# Altium PCB HV_DAC_1PPM.PcbDoc (part 4 of 5)
Units mm, origin at the board's own origin, x right, y up, seen from the top; angles counter-clockwise.
Board outline 148 x 86 mm, 6 copper layers (Layer 1, Layer 2, Layer 3, Layer 4, Layer 5, Layer 6), stack 1.615 mm thick; 392 components, 227 nets, 1037 pads, 645 vias.
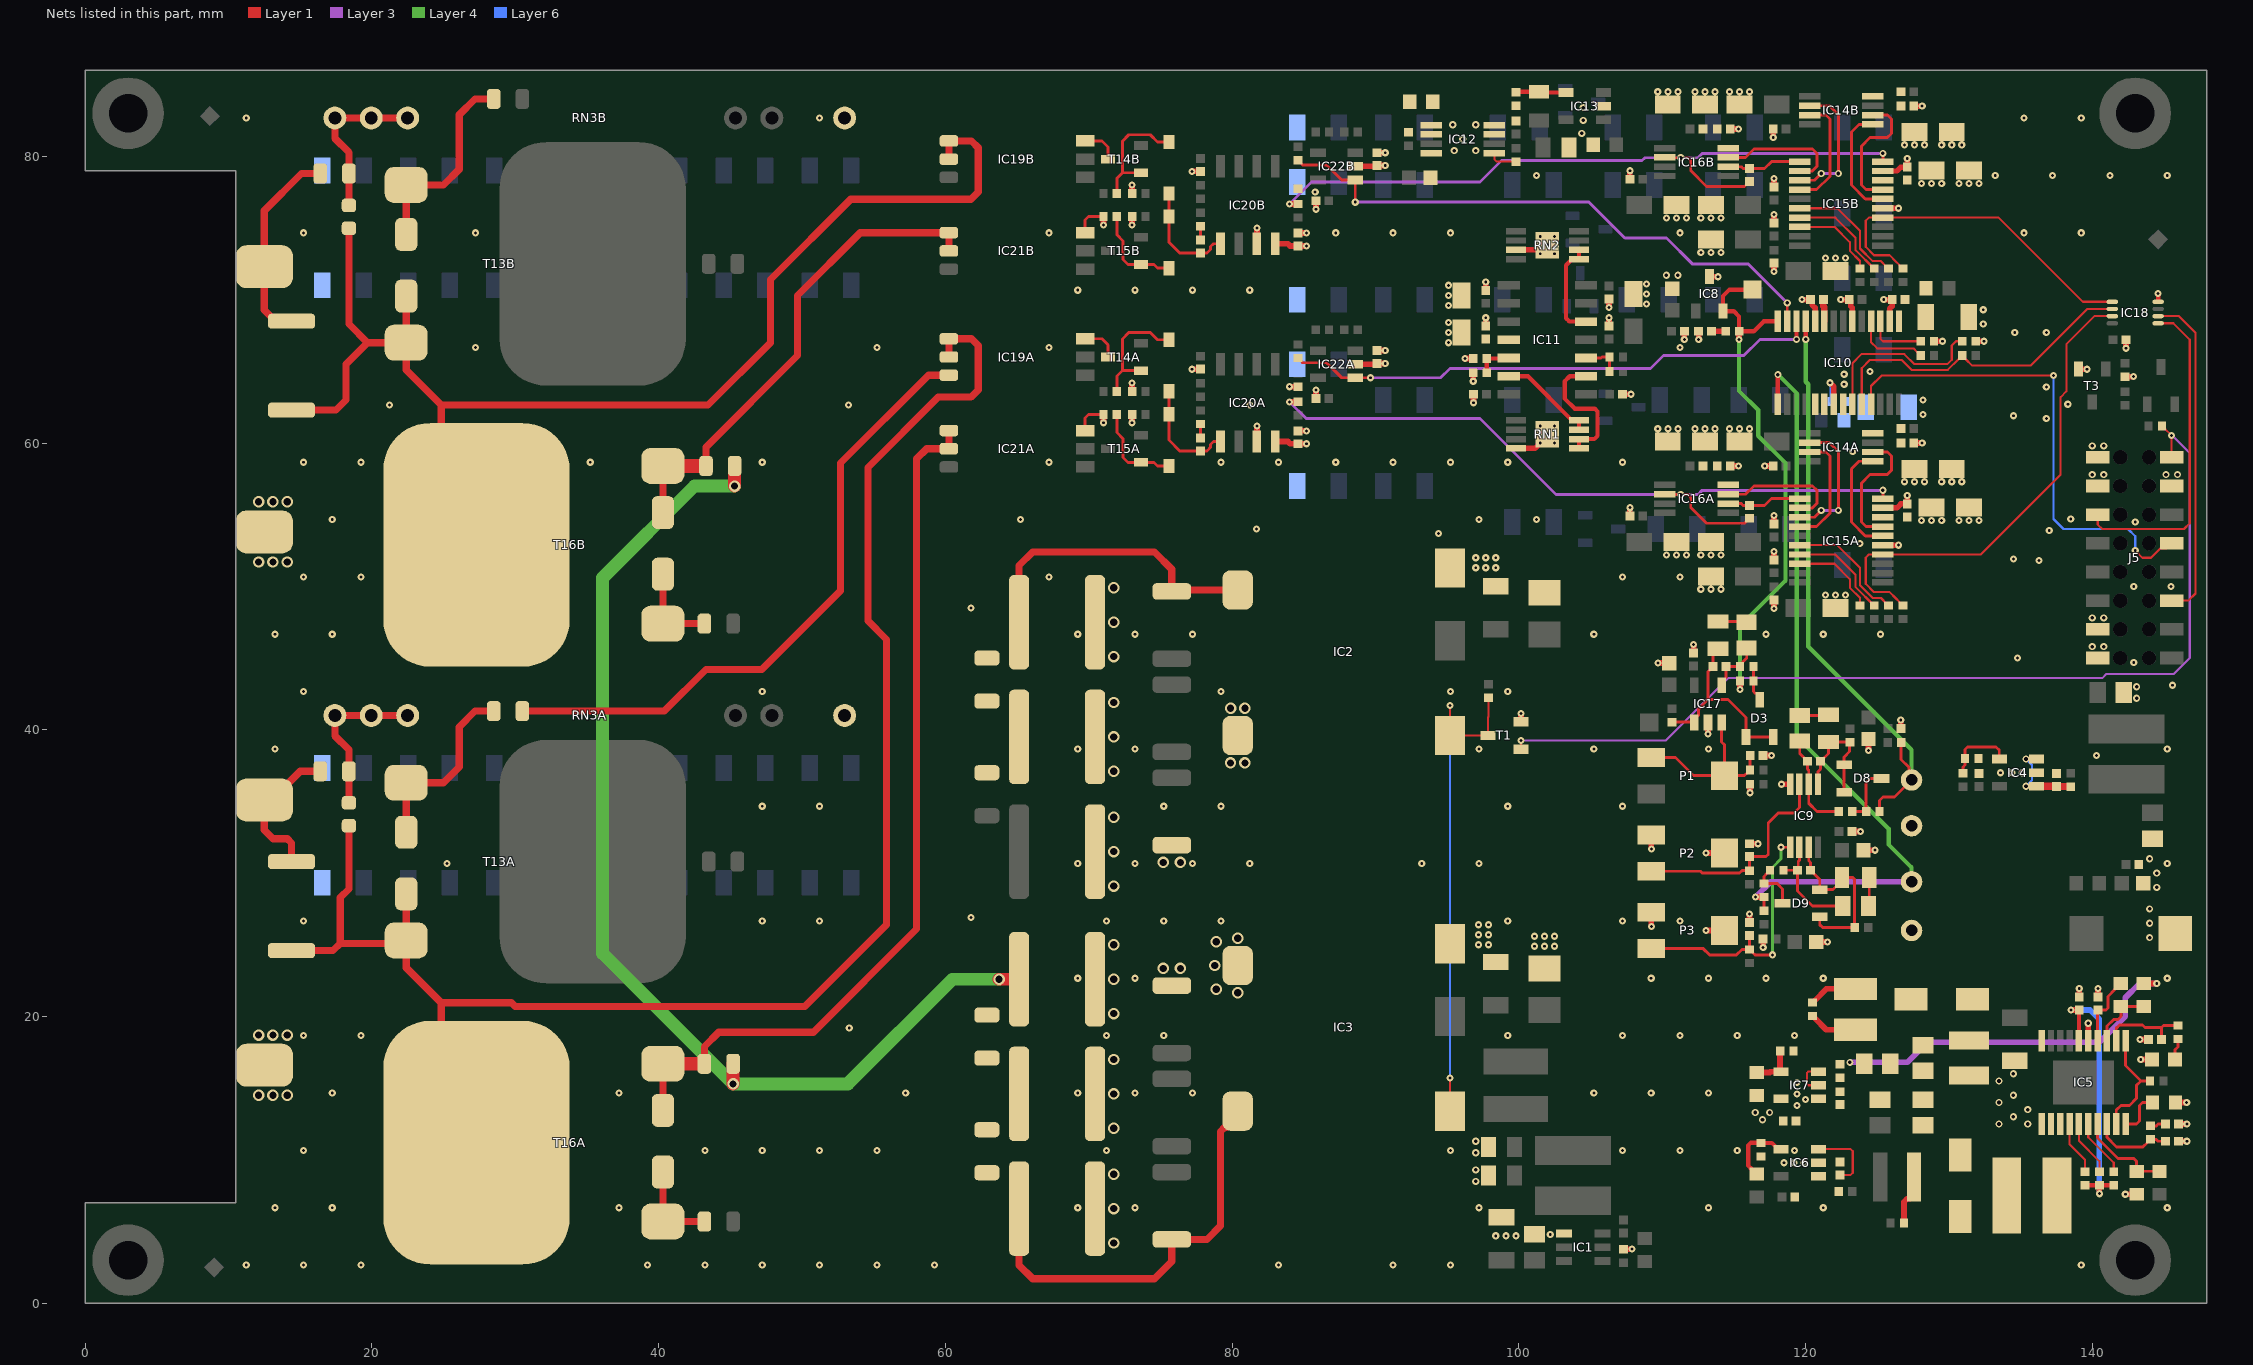
[diagram p6: the nets of this part, all layers, seen from the top]

## Part data (continued)
T13A T13B T16A T16B: "MOSFET N-CH 4500V 0.2A TO268", Case/Package=TO-268, Continuous Drain Current (ID)=200mA, Drain to Source Breakdown Voltage=4.5kV, Drain to Source Resistance=750R, Gate to Source Voltage (Vgs)=20V, Input Capacitance=256pF, Manufacturer=IXYS, Max Operating Temperature=150°C, Max Power Dissipation=113W, Min Operating Temperature=-55°C, Package Quantity=30, Supplier Part Number=747-IXTT02N450HV, Category=Transistors, ComponentLink1Description=https://datasheet.ciiva.com/6377/ds100498ixta-t02n450hv-6377632.pdf?src-supplier=Digikey, ComponentLink1URL=https://datasheet.ciiva.com/6377/ds100498ixta-t02n450hv-6377632.pdf?src-supplier=Digikey, Drain to Source Voltage (Vdss)=4.5kV, Fall Time=143ns, Manufacturer Part Number=IXTT02N450HV, Mounting Technology="Surface Mount", Packaging=Rail/Tube, Polarity=N-CHANNEL, Power Dissipation=113W, Pricing="1=30.1, 10=27.79, 50=20.94, 100=20.94, 1000=20.47, 10000=20.47 (USD)", Rds On Max=750R, Rise Time=48ns, RoHS=Yes, RoHS Compliant=Yes, Series=-, Stock=803, Supplier=Mouser, Turn-Off Delay Time=28ns
T14A T14B: "NPN Transistor", Case=SOT23-3, Manufacturer="NXP SEMICONDUCTORS", Author="CERN DEM JLC", Bonding=No, Component Type=Standard, ComponentHeight=1.1mm, CreateDate=6/14/2011, Device=BC847B, HelpURL=\\cern.ch\dfs\Applications\Altium\Datasheets\BC847B.pdf, LatestRevisionDate=6/14/2011, Manufacturer Part Number=BC847B, Mounted=Yes, PackageDescription="SOT23, 0.95mm Pitch; 3 Pin, 1.30mm W X 2.90mm L X 1.10mm H body, IPC Medium Density", Part Description="45V 100mA NPN General-Purpose Transistor", Part Number=BC847B, Pin Count=3, PressFit=No, Sense=No, SMD=Yes, Socket=No
T15A T15B: "PNP Transistor", Case=SOT23-3, Manufacturer="NXP SEMICONDUCTORS", Author="CERN DEM JLC", Bonding=No, Component Type=Standard, ComponentHeight=1.1mm, CreateDate=6/14/2011, Device=BC857B, HelpURL=\\cern.ch\dfs\Applications\Altium\Datasheets\BC857B.pdf, LatestRevisionDate=6/14/2011, Manufacturer Part Number=BC857B, Mounted=Yes, PackageDescription="SOT23, 0.95mm Pitch; 3 Pin, 1.30mm W X 2.90mm L X 1.10mm H body, IPC Medium Density", Part Description="-45V -100mA PNP General-Purpose Transistors", Part Number=BC857B, Pin Count=3, PressFit=No, Sense=No, SMD=Yes, Socket=No
TP2 TP3: library part SMD_PAD_1.27X1.27MM, Author="CERN DEM JLC", Component Type="Standard (No BOM)", ComponentHeight=0mm, CreateDate=12.01.2008, Family="Test Point", HelpURL=Undefined, LatestRevisionDate=12.01.2008, Mounted=No, PackageDescription="1.27mm x 1.27mm PCB Copper Area (SMD Test Point)", Part Description="1.27mm x 1.27mm PCB Copper Area (SMD Test Point)", Part Number=SMD_PAD_1.27X1.27MM, Pin Count=1, Sense=No, SMD=Yes, Socket=No, Status=None

## Via types
v1: diameter 0.5, hole 0.2, Layer 1 to Layer 6, tented both sides, 520 vias
v2: diameter 0.5, hole 0.25, Layer 1 to Layer 6, tented both sides, 74 vias
v3: diameter 0.8, hole 0.5, Layer 1 to Layer 6, tented both sides, 47 vias
v4: diameter 0.8, hole 0.5, Layer 1 to Layer 6, tented bottom, 2 vias
v5: diameter 0.5, hole 0.25, Layer 1 to Layer 6, tented bottom, 2 vias

## Nets (pads, with @x,y where several pads share a name; then routed paths per layer and width w, separated by ;. In a path a pad name is that pad's centre, name@x,y a point inside that pad or via, vN(x,y) a via of type N, cw(c..) or ccw(c..) an arc to the next point about the centre after c; other vN are vias at no path point)
ADC_AIN0: B5.1 IC10.11 R137.1 R139.1 | length 41.5
  Layer 1 w0.2: R139.1@125.17,34.3 125.17,35.07 125.4,35.3 126.2,35.3 B5.1@127.4,36.5 127.21,36.69 127.21,37.39 126.67,37.93 R137.1@126.67,39.1
  Layer 1 w0.3: v2(120.025,67.225) IC10.11@120.025,68.5
  Layer 4 w0.3: v2(120.025,67.225) 120.025,64.275 120.2,64.1 120.2,45.8 127.4,38.6 B5.1@127.4,36.5
ADC_AIN1: IC10.12 IC22A.1 R131A.1 | length 37.7
  Layer 1 w0.2: R131A.1@84.6,65.93 84.62,65.93 84.81,65.74 84.81,65.72 84.93,65.6 86.6,65.6 87.65,64.55 IC22A.1@88.6,64.55 v1(89.65,64.55)
  Layer 1 w0.3: v2(119.375,67.225) IC10.12@119.375,68.5
  Layer 3 w0.2: v1(89.65,64.55) 94.55,64.55 95.2,65.2 109.2,65.2 110.1,66.1 115.7,66.1 116.825,67.225 v2(119.375,67.225)
ADC_AIN4: IC10.13 IC22B.1 R131B.1 | length 40.4
  Layer 1 w0.2: R131B.1@84.6,79.73 84.62,79.73 84.81,79.54 84.81,79.52 84.93,79.4 86.6,79.4 87.65,78.35 IC22B.1@88.6,78.35 v1(88.6,76.8) ; IC10.13@118.725,68.5 v2(118.725,69.775)
  Layer 3 w0.2: v1(88.6,76.8) 104.9,76.8 107.4,74.3 110.3,74.3 112.1,72.5 116,72.5 v2(118.725,69.775)
ADC_AIN5: IC8.2 IC10.14 R61.1 R64.2 TP2.1 | length 36.8
  Layer 1 w0.3: TP2.1@116.3,70.7 114.7,70.7 114.25,70.25 IC8.2@114.25,69.2 115,69.2 115.37,68.83 R64.2@115.37,67.8 116.4,67.8 117.1,68.5 IC10.14@118.075,68.5
  Layer 1 w0.4: v1(115.37,67.21) R64.2@115.37,67.8 ; v1(115.43,42.81) R61.1@115.43,43.4
  Layer 4 w0.3: v1(115.37,67.21) 115.37,63.63 116.7,62.3 116.7,60.5 118.6,58.6 118.6,50.4 115.43,47.23 v1(115.43,42.81)
ADC_AIN6: B6.1 IC10.15 R138.1 R141.1 | length 54.2
  Layer 1 w0.2: R138.1@117.1,27.37 R141.1@117.1,28.33
  Layer 1 w0.3: IC10.15@118.075,62.7 v2(118.075,64.775)
  Layer 1 w0.4: v1(116.51,28.33) R141.1@117.1,28.33
  Layer 3 w0.4: v1(116.51,28.33) 117.58,29.4 B6.1@127.4,29.4
  Layer 4 w0.3: v2(118.075,64.775) 119.4,63.45 119.4,39.5 125.8,33.1 125.8,32 127.4,30.4 B6.1@127.4,29.4
ADC_AVDD: C47.2 C48.2 IC10.22 R98.1
  other v1: 122.7,64.1 122.7,64.8
ADC_CLK: IC10.3 R96.2 | length 4.1
  Layer 1 w0.15: IC10.3@125.225,68.5 125.225,67.275 125.4,67.1 R96.2@128.03,67.1
ADC_DRDYn: IC10.25 J5.9 | length 34.7
  Layer 1 w0.15: IC10.25@124.575,62.7 124.575,63.975 125.3,64.7 v1(137.3,64.7) ; v1(143,52.5) 143.5,52 144.1,52 144.734,52.634 145.169,52.634 J5.9@145.539,53.004
  Layer 6 w0.15: v1(137.3,64.7) 137.3,54.7 138,54 142.5,54 143,53.5 v1(143,52.5)
ADC_DVDD: C49.2 C50.2 IC10.1 R99.2
ADC_IEXC1: IC10.20
ADC_IEXC2: IC10.19
ADC_REFOUT: C46.2 IC10.9 | length 1.5
  Layer 1 w0.45: C46.2@121.25,70 121.25,69.55 121.325,69.475 IC10.9@121.325,68.5
ADC_RESETn: IC10.4 R95.1 | length 5.3
  Layer 1 w0.15: IC10.4@124.575,68.5 124.575,67.025 125,66.6 127.53,66.6 127.795,66.335 127.815,66.335 128.03,66.12 R95.1@128.03,66.1
ADC_START: IC10.23 R97.2 | length 12.3
  Layer 1 w0.15: IC10.23@123.275,62.7 123.275,65.575 123.9,66.2 126.9,66.2 127.6,65.5 129.9,65.5 130.2,65.8 130.2,66.8 130.5,67.1 R97.2@130.93,67.1
CSn_0: IC18.2 J5.5 | length 23.1
  Layer 1 w0.15: IC18.2@144.6,68.85 146.05,68.85 147.2,67.7 147.2,49.5 146.704,49.004 J5.5@145.539,49.004
CSn_1: IC18.1 J5.12 | length 22.9
  Layer 1 w0.15: J5.12@140.389,55.004 140.389,54.311 140.7,54 146.4,54 146.8,54.4 146.8,67.2 145.65,68.35 IC18.1@144.6,68.35
CSn_ADC: IC10.24 IC18.6 R94.1 | length 22.9
  Layer 1 w0.15: IC10.24@123.925,62.7 123.925,65.225 124.5,65.8 126.7,65.8 127.4,65.1 129.93,65.1 130.695,65.865 130.715,65.865 R94.1@130.93,66.08 ; R94.1@130.93,66.1 R94.1@130.93,66.08 ; IC18.6@141.4,69.35 139.65,69.35 135.7,65.4 131.63,65.4 131.165,65.865 131.145,65.865 R94.1@130.93,66.08
CSn_DAC1: IC15B.14 IC18.5 R108B.1 | length 24.8
  Layer 1 w0.15: R108B.1@126.8,72.17 126.78,72.17 126.565,72.385 126.565,72.405 126.285,72.685 125.87,73.1 124.782,73.1 124.2,73.682 124.2,75.5 124.425,75.725 IC15B.14@125.4,75.725 133.475,75.725 139.35,69.85 IC18.5@141.4,69.85
CSn_DAC2: IC15A.14 IC18.7 R108A.1 | length 34.3
  Layer 1 w0.15: R108A.1@126.8,48.67 126.78,48.67 126.565,48.885 126.565,48.905 126.285,49.185 125.87,49.6 124.782,49.6 124.2,50.182 124.2,52 124.425,52.225 IC15A.14@125.4,52.225 132.225,52.225 137.8,57.8 137.8,63.2 138.2,63.6 138.2,66.9 140.15,68.85 IC18.7@141.4,68.85
DAC_CLRnA: IC15A.7 R109A.1 | length 7.2
  Layer 1 w0.15: IC15A.7@119.6,52.225 122.075,52.225 123.5,50.8 123.5,49.95 124.78,48.67 R109A.1@124.8,48.67
DAC_CLRnB: IC15B.7 R109B.1 | length 7.2
  Layer 1 w0.15: IC15B.7@119.6,75.725 122.075,75.725 123.5,74.3 123.5,73.45 124.78,72.17 R109B.1@124.8,72.17
DAC_INVA: C71A.1 IC15A.1 IC16A.2 | length 5.2
  Layer 1 w0.2: IC16A.2@114.6,55.775 115.525,55.775 115.65,55.65 C71A.1@116.1,55.65 117.15,55.65 117.625,56.125 IC15A.1@119.6,56.125
DAC_INVB: C71B.1 IC15B.1 IC16B.2 | length 5.2
  Layer 1 w0.2: IC16B.2@114.6,79.275 115.525,79.275 115.65,79.15 C71B.1@116.1,79.15 117.15,79.15 117.625,79.625 IC15B.1@119.6,79.625
DAC_LDACnA: IC15A.8 R110A.1 | length 6.1
  Layer 1 w0.15: IC15A.8@119.6,51.575 122.025,51.575 123.1,50.5 123.1,49.9 123.8,49.2 R110A.1@123.8,48.67
DAC_LDACnB: IC15B.8 R110B.1 | length 6.1
  Layer 1 w0.15: IC15B.8@119.6,75.075 122.025,75.075 123.1,74 123.1,73.4 123.8,72.7 R110B.1@123.8,72.17
DAC_RESETnA: IC15A.6 R111A.1 | length 8.6
  Layer 1 w0.15: IC15A.6@119.6,52.875 122.225,52.875 123.8,51.3 123.8,50.074 124.689,49.185 125.265,49.185 125.68,48.77 R111A.1@125.8,48.77
DAC_RESETnB: IC15B.6 R111B.1 | length 8.6
  Layer 1 w0.15: IC15B.6@119.6,76.375 122.225,76.375 123.8,74.8 123.8,73.574 124.689,72.685 125.265,72.685 125.68,72.27 R111B.1@125.8,72.27
DAC_RFBA: C71A.2 IC15A.20 IC16A.6 R117A.2 | length 52.6
  Layer 1 w0.2: IC16A.6@110.225,56.4 v2(111.3,56.4) 111.8,56.4 112,56.2 112,55.5 113.1,54.4 115.75,54.4 C71A.2@116.1,54.75 ; IC15A.20@125.4,56.125 v2(125.4,56.7)
  Layer 1 w0.4: v1(84.01,62.87) R117A.2@84.6,62.87
  Layer 3 w0.2: v1(84.01,62.87) 85.18,61.7 97.3,61.7 102.6,56.4 v2(111.3,56.4) 112.5,56.4 112.8,56.7 v2(125.4,56.7)
DAC_RFBB: C71B.2 IC15B.20 IC16B.6 R117B.2 | length 51.3
  Layer 1 w0.2: IC16B.6@110.225,79.9 v2(111.3,79.9) 111.8,79.9 112,79.7 112,79 113.1,77.9 115.75,77.9 C71B.2@116.1,78.25 ; IC15B.20@125.4,79.625 v2(125.4,80.2)
  Layer 1 w0.4: v1(84.01,76.67) R117B.2@84.6,76.67
  Layer 3 w0.2: v1(84.01,76.67) 85.54,78.2 97.3,78.2 98.8,79.7 108.6,79.7 108.8,79.9 v2(111.3,79.9) 112.5,79.9 112.8,80.2 v2(125.4,80.2)
DAC_VOUTA: IC15A.2 IC16A.3 | length 8.8
  Layer 1 w0.2: IC16A.3@114.6,56.425 115.825,56.425 116.4,57 120.5,57 120.8,56.7 120.8,55.8 120.475,55.475 IC15A.2@119.6,55.475
DAC_VOUTB: IC15B.2 IC16B.3 | length 8.8
  Layer 1 w0.2: IC16B.3@114.6,79.925 115.825,79.925 116.4,80.5 120.5,80.5 120.8,80.2 120.8,79.3 120.475,78.975 IC15B.2@119.6,78.975
DAC_VREFNFA: IC14A.1 IC15A.16 | length 8
  Layer 1 w0.2: IC14A.1@124.7,58.725 123.725,58.725 123.2,58.2 123.2,54.5 124.175,53.525 IC15A.16@125.4,53.525
DAC_VREFNFB: IC14B.1 IC15B.16 | length 8
  Layer 1 w0.2: IC14B.1@124.7,82.225 123.725,82.225 123.2,81.7 123.2,78 124.175,77.025 IC15B.16@125.4,77.025
DAC_VREFNSA: IC14A.2 IC15A.17 | length 9.2
  Layer 1 w0.2: IC14A.2@124.7,59.375 125.725,59.375 126,59.1 126,58.1 125.7,57.8 124.5,57.8 123.9,57.2 123.9,54.5 124.225,54.175 IC15A.17@125.4,54.175
DAC_VREFNSB: IC14B.2 IC15B.17 | length 9.2
  Layer 1 w0.2: IC14B.2@124.7,82.875 125.725,82.875 126,82.6 126,81.6 125.7,81.3 124.5,81.3 123.9,80.7 123.9,78 124.225,77.675 IC15B.17@125.4,77.675
DAC_VREFPFA: IC14A.7 IC15A.4 | length 8
  Layer 1 w0.2: IC15A.4@119.6,54.175 120.775,54.175 121.7,55.1 121.7,59.1 121.425,59.375 IC14A.7@120.3,59.375
DAC_VREFPFB: IC14B.7 IC15B.4 | length 8
  Layer 1 w0.2: IC15B.4@119.6,77.675 120.775,77.675 121.7,78.6 121.7,82.6 121.425,82.875 IC14B.7@120.3,82.875
DAC_VREFPSA: IC14A.6 IC15A.3 | length 9.3
  Layer 1 w0.2: IC15A.3@119.6,54.825 120.625,54.825 v2(121.1,55.3) ; IC14A.6@120.3,60.025 121.675,60.025 122.3,59.4 v2(122.3,55.3)
  Layer 3 w0.2: v2(121.1,55.3) v2(122.3,55.3)
DAC_VREFPSB: IC14B.6 IC15B.3 | length 9.3
  Layer 1 w0.2: IC15B.3@119.6,78.325 120.625,78.325 v2(121.1,78.8) ; IC14B.6@120.3,83.525 121.675,83.525 122.3,82.9 v2(122.3,78.8)
  Layer 3 w0.2: v2(121.1,78.8) v2(122.3,78.8)
GND: B7.1 B8.1 C2.2 C3.1 C4.1 C5.1 C6.1 C7.1 C8.1 C9.1 C10.1 C11.1 C12.2 C13.2 C14.2 C15.2 C16.1 C17.1 C18.1 C19.1 C20.1 C21.1 C22.1 C23.1 C24.1 C25.1 C26.1 C27.2 C28.1 C29.1 C30.1 C31.1 C32.1 C33.1 C34.2 C35.1 C36.1 C37.1 C39.1 C41.1 C42.1 C43.1 C44.1 C45.1 C46.1 C47.1 C48.1 C49.1 C50.1 C51.2 C52.1 C53.1 C54.1 C55.1 C56.1 C57.1 C58.1 C59.1 C60.1 C61.1 C62.1 C63A.2 C63B.2 C64A.2 C64B.2 C65.1 C66A.1 C66B.1 C67A.1 C67B.1 C68.1 C72A.2 C72B.2 C73A.2 C73B.2 C74A.2 C74B.2 C75A.1 C75B.1 C76A.1 C76B.1 C77A.1 C77B.1 C78A.1 C78B.1 C79A.1 C79B.1 C80A.1 C80B.1 C81A.1 C81B.1 C82.1 C84A.1 C84B.1 C86A.1 C86B.1 C87A.1 C87B.1 C88A.2 C88B.2 C89A.2 C89B.2 C90A.1 C90B.1 C95.1 C96.1 C97.1 C98.1 C99.1 C101.1 C103.1 C104.1 IC1.1 IC2.1 IC2.4 IC3.1 IC3.3 IC4.2 IC5.1 IC5.15 IC6.2 IC7.1 IC8.3 IC9.4 IC10.2 IC10.6 IC10.10 IC10.21 IC12.3 IC12.4 IC12.5 IC12.8 IC13.2 IC15A.15 IC15A.19 IC15B.15 IC15B.19 IC17.2 IC18.4 IC20A.3 IC20B.3 J2.1 J4.1 J5.2 J5.4 J5.13 J5.14 J5.16 L7.1 P2.1 P2.2 P3.1 P3.2 R5.1 R11.1 R18.1 R21.2 R22.1 R23.2 R32.1 R84.1 R85.1 R86.1 R87.1 R88.1 R89.1 R90.1 R91.1 R92.1 R93.1 R96.1 R97.1 R102.1 R106.1 R107.1 R116A.1 R116B.1 R120A.2 R120B.2 R125.1 R130.2 R133A.2 R133B.2 RN1.8 RN1.9 RN2.3 RN2.9 RN3A.6 RN3B.6 T1.2 T3.2 | length 70
  Layer 1 w0.3: IC18.4@144.6,69.85 v1(144.6,70.44)
  Layer 1 w0.381: RN1.8@99.8,59.625 101.125,59.625 v1(101.5,60) ; RN2.3@99.8,73.475 101.366,73.475 101.5,73.341 v1(101.5,73.2) ; C46.1@120.35,70 120.47,69.881 120.47,69.63 120.675,69.425 IC10.10@120.675,68.5 ; v1(121.7,64.2) 121.975,63.925 IC10.21@121.975,62.7 ; C45.1@123.05,70 123.17,69.881 123.17,69.53 123.275,69.425 IC10.6@123.275,68.5 ; IC15A.19@125.4,55.475 126.375,55.475 126.65,55.75 C77A.1@127.1,55.75 ; IC15B.19@125.4,78.975 126.375,78.975 126.65,79.25 C77B.1@127.1,79.25 ; IC10.2@125.875,68.5 125.875,69.375 126.05,69.55 C49.1@126.05,70 ; IC5.15@139.725,18.3 v2(139.725,19.525)
  Layer 1 w0.4: v1(73.03,61.41) R120A.2@73.03,62 ; R116A.1@73.03,63.6 v1(73.03,64.19) ; v1(73.03,75.21) R120B.2@73.03,75.8 ; R116B.1@73.03,77.4 v1(73.03,77.99) ; v1(77.21,65.15) C80A.1@77.8,65.15 ; v1(77.21,78.95) C80B.1@77.8,78.95 ; IC20A.3@81.735,60.1 v1(81.735,61.19) ; IC20B.3@81.735,73.9 v1(81.735,74.99) ; v1(84.01,63.93) R133A.2@84.6,63.93 ; C90A.1@84.6,60.85 v1(85.19,60.85) ; C90B.1@84.6,74.65 v1(85.19,74.65) ; C86A.1@85.85,63.1 v1(85.85,63.69) ; v1(85.85,76.31) C86B.1@85.85,76.9 ; C84A.1@90.1,66.45 v1(90.69,66.45) ; C84B.1@90.1,80.25 v1(90.69,80.25) ; v1(96.24,65.9) R106.1@96.83,65.9 ; v1(96.83,64.31) R107.1@96.83,64.9 ; v1(96.85,62.81) C62.1@96.85,63.4 ; C61.1@97.7,68.15 v1(97.7,68.74) ; C65.1@97.7,70.65 v1(97.7,71.24) ; T1.2@100.15,40.55 v1(100.15,41.14) ; C52.1@106.3,68.15 v1(106.3,68.74) ; v1(106.3,69.46) C68.1@106.3,70.05 ; C55.1@107.25,63.4 v1(107.84,63.4) ; R5.1@107.3,3.77 v1(107.89,3.77) ; C66A.1@107.75,54.9 v1(107.75,55.49) ; C66B.1@107.75,78.4 v1(107.75,78.99) ; v1(109.25,26.28) P3.1@109.25,27.27 ; v1(109.25,31.68) P2.1@109.25,32.67 ; v1(109.71,44.65) C42.1@110.5,44.65 ; v1(111.55,67.21) C39.1@111.55,67.8 ; C43.1@112.2,45.35 v1(112.2,45.94) ; v1(112.55,67.21) C41.1@112.55,67.8 ; v1(113.06,26) P3.2@114.35,26 ; v1(113.06,31.4) P2.2@114.35,31.4 ; v1(113.2,39.71) IC17.2@113.2,40.5 ; IC8.3@113.3,71.6 v1(113.89,71.6) ; C88A.2@114.75,58.4 v1(115.34,58.4) ; C88B.2@114.75,81.9 v1(115.34,81.9) ; C104.1@116.1,26.55 v1(116.1,27.14) ; C103.1@116.1,32.05 v1(116.69,32.05) ; v1(116.13,35.61) R93.1@116.13,36.2 ; v1(117.05,24.81) C98.1@117.05,25.4 ; C44.1@117.05,38.2 v1(117.64,38.2) ; v1(117.16,58.4) C67A.1@117.75,58.4 ; v1(117.75,81.31) C67B.1@117.75,81.9 ; v1(117.8,48.46) C78A.1@117.8,49.05 ; C79A.1@117.8,51.85 v1(117.8,52.44) ; C75A.1@117.8,54.35 v1(117.8,54.94) ; v1(117.8,71.96) C78B.1@117.8,72.55 ; C79B.1@117.8,75.35 v1(117.8,75.94) ; C75B.1@117.8,77.85 v1(117.8,78.44) ; v1(118.335,36.2) IC9.4@118.925,36.2 ; v1(119.76,70) C46.1@120.35,70 ; C96.1@120.75,25.2 v1(121.54,25.2) ; v1(122.46,70) C45.1@123.05,70 ; C101.1@123.25,32.9 v1(123.84,32.9) ; C99.1@124.05,31.6 v1(124.84,31.6) ; v1(124.4,38.56) C95.1@124.4,39.35 ; IC15A.15@125.4,52.875 v1(126.49,52.875) ; IC15B.15@125.4,76.375 v1(126.49,76.375) ; v1(125.46,70) C49.1@126.05,70 ; C97.1@126.65,40.1 v1(126.65,40.69) ; C77A.1@127.1,55.75 v1(127.1,56.34) ; C77B.1@127.1,79.25 v1(127.1,79.84) ; C89A.2@127.55,60 v1(128.14,60) ; C89B.2@127.55,83.5 v1(128.14,83.5) ; R96.1@128.97,67.1 v1(129.56,67.1) ; R97.1@131.87,67.1 v1(132.46,67.1) ; T3.2@139.05,65.15 v1(139.64,65.15) ; C28.1@139.1,21.35 v1(139.1,21.94) ; C27.2@140.4,21.35 v1(140.4,21.94) ; R23.2@142.3,64.63 v1(142.89,64.63) ; v1(142.31,7.6) R22.1@143.1,7.6 ; v1(142.35,66.61) C82.1@142.35,67.2 ; v1(143.335,18.4) C24.1@143.925,18.4 ; v1(143.385,17) C26.1@144.175,17 ; R21.2@145.8,14 v1(146.59,14) ; C19.1@146.01,11.3 v1(146.6,11.3) ; C20.1@146.01,12.5 v1(146.6,12.5)
  Layer 6 w0.381: v1(121.7,64.2) 121.7,64.168 121.85,64.018 C48.1@121.85,62.9
  other v1: 11.237,2.662 15.237,2.662 19.237,2.662 39.237,2.662 43.237,2.662 47.237,2.662 51.237,2.662 55.237,2.662 59.237,2.662 83.237,2.662 91.237,2.662 95.237,2.662 139.237,2.662 98.4,4.7 99.1,4.7 99.8,4.7 102.2,4.8 13.237,6.662 17.237,6.662 37.237,6.662 69.237,6.662 73.237,6.662 97.237,6.662 113.237,6.662 121.237,6.662 145.237,6.662 118.5,9.8 119.2,9.8 119.9,9.8 15.237,10.662 43.237,10.662 47.237,10.662 51.237,10.662 55.237,10.662 71.237,10.662 95.237,10.662 107.237,10.662 111.237,10.662 115.237,10.662 119.237,10.662 119.4,13.8 120,14.2 119.4,14.6 17.237,14.662 37.237,14.662 57.237,14.662 69.237,14.662 73.237,14.662 77.237,14.662 105.237,14.662 109.237,14.662 113.237,14.662 119.4,15.4 15.237,18.662 19.237,18.662 71.237,18.662 75.237,18.662 99.237,18.662 107.237,18.662 111.237,18.662 115.237,18.662 119.237,18.662 53.3,19.2 69.237,22.662 73.237,22.662 109.237,22.662 113.237,22.662 117.237,22.662 121.237,22.662 145.237,22.662 101.1,24.9 101.8,24.9 102.5,24.9 97.2,25 97.9,25 101.1,25.6 101.8,25.6 102.5,25.6 97.2,25.7 97.9,25.7 97.2,26.4 97.9,26.4 15.237,26.662 47.237,26.662 51.237,26.662 71.237,26.662 75.237,26.662 79.237,26.662 99.237,26.662 107.237,26.662 111.237,26.662 61.8,26.9 25.237,30.662 69.237,30.662 73.237,30.662 77.237,30.662 81.237,30.662 93.237,30.662 97.237,30.662 145.237,30.662 47.237,34.662 51.237,34.662 75.237,34.662 79.237,34.662 99.237,34.662 107.237,34.662 133.6,37 134.4,37 135.1,37 140.3,38.2 13.237,38.662 69.237,38.662 73.237,38.662 97.237,38.662 105.237,38.662 113.237,38.662 145.237,38.662 15.237,42.662 47.237,42.662 79.237,42.662 95.237,42.662 99.237,42.662 145.6,43.1 142.9,44.7 134.8,45 13.237,46.662 17.237,46.662 69.237,46.662 73.237,46.662 77.237,46.662 105.237,46.662 117.237,46.662 121.237,46.662 125.237,46.662 61.8,48.5 121.4,49.4 122.1,49.4 122.8,49.4 112.7,49.8 113.4,49.8 114.1,49.8 142.9,50 145.5,50 15.237,50.662 19.237,50.662 67.237,50.662 107.237,50.662 111.237,50.662 97,51.3 97.7,51.3 98.4,51.3 136.3,51.8 134.5,51.9 97,52 97.7,52 98.4,52 110.3,52.2 111,52.2 111.7,52.2 112.7,52.2 113.4,52.2 114.1,52.2 123.8,53 94.4,53.7 137,53.9 81.7,54 143,54.5 130.7,54.6 131.4,54.6 132.1,54.6 17.237,54.662 65.237,54.662 97.237,54.662 101.237,54.662 138.5,54.7 129.5,57.3 130.2,57.3 130.9,57.3 15.237,58.662 19.237,58.662 35.237,58.662 47.237,58.662 67.237,58.662 79.237,58.662 83.237,58.662 87.237,58.662 91.237,58.662 95.237,58.662 99.237,58.662 107.237,58.662 123.3,59.4 102.5,60 102,60.6 109.7,61 110.4,61 111.1,61 114.7,61 115.4,61 116.1,61 101.5,61.2 102.5,61.2 136.8,61.7 134.5,61.9 128.2,62 21.237,62.662 53.237,62.662 81.237,62.662 138.3,62.7 128.2,63 136.8,63.9 124.5,65 27.237,66.662 55.237,66.662 67.237,66.662 111.237,66.662 134.6,67.7 136.8,67.7 132.4,68.3 132.4,69.3 95.1,69.6 108.9,69.7 95.1,70.3 108.9,70.4 69.237,70.662 73.237,70.662 77.237,70.662 81.237,70.662 95.1,71 108.9,71.1 121.4,72.9 122.1,72.9 122.8,72.9 102.5,73.2 112.7,73.3 113.4,73.3 114.1,73.3 102,73.8 101.5,74.4 102.5,74.4 15.237,74.662 27.237,74.662 67.237,74.662 87.237,74.662 91.237,74.662 95.237,74.662 111.237,74.662 135.237,74.662 139.237,74.662 110.3,75.7 111,75.7 111.7,75.7 112.7,75.7 113.4,75.7 114.1,75.7 85.8,77.5 130.7,78.1 131.4,78.1 132.1,78.1 101.237,78.662 133.237,78.662 137.237,78.662 141.237,78.662 145.237,78.662 129.5,80.8 130.2,80.8 130.9,80.8 11.237,82.662 51.237,82.662 135.237,82.662 139.237,82.662 109.7,84.5 110.4,84.5 111.1,84.5 114.7,84.5 115.4,84.5 116.1,84.5
  other v2: 97,8.5 97,9.3 97,10.5 97,11.3 133.5,12.5 135.5,12.5 134.5,13 135.5,13.5 133.5,14 134.5,14.5 133.5,15.5 134.5,16 144,25.5 144,26.5 144,27.5 144.5,29 144.5,30 144,31 143.1,42.2 143.1,43 140,45.8 140.8,45.8 140,47.8 140.8,47.8 140,57.8 140.8,57.8 145.15,57.8 145.95,57.8 140,59.8 140.8,59.8 110.3,71.7 111.1,71.7 95.5,80.4 97,80.4 96.1,81.2 104.4,81.6 95.4,82.2 97,82.2 104.5,82.5 104.5,83.4
  other v3: 71.75,4.2 71.75,6.6 71.75,9 71.75,12.2 12.1,14.5 13.1,14.5 14.1,14.5 71.75,14.6 71.75,17 12.1,18.7 13.1,18.7 14.1,18.7 71.75,20.2 80.398,21.655 78.9,21.9 71.75,22.6 75.2,23.35 76.4,23.35 78.798,23.555 71.75,25 78.9,25.21 80.398,25.455 71.75,29.1 75.2,30.75 76.4,30.75 71.75,31.5 71.75,33.9 71.75,37.1 79.895,37.69 80.895,37.69 71.75,39.5 79.9,41.5 80.9,41.5 71.75,41.9 71.75,45.1 71.75,47.5 71.75,49.9 12.1,51.7 13.1,51.7 14.1,51.7 12.1,55.9 13.1,55.9 14.1,55.9
HV_EN: J5.15 R8.1 T1.1 | length 68.2
  Layer 1 w0.15: T1.1@100.15,38.65 v1(100.15,39.24) ; R8.1@144.87,61.2 144.87,61.18 145.085,60.965 145.105,60.965 v1(145.539,60.531) J5.15@145.539,59.004
  Layer 3 w0.15: v1(100.15,39.24) 110.24,39.24 114.6,43.6 140.7,43.6 141,43.9 145.7,43.9 146.8,45 146.8,59.3 145.569,60.531 v1(145.539,60.531)
HV_OUT_RA: C85A.2 D4A.2 IC19A.4 IC19A.5 R118A.2 T13A.2 T16A.3 | length 118.6
  Layer 1 w0.5: R118A.2@14.4,24.6 17.3,24.6 17.8,25.1 ; C85A.2@18.4,33.275 18.4,28.9 17.8,28.3 17.8,25.1 ; D4A.2@22.4,28.55 T13A.2@22.4,25.3 ; T16A.3@27.3,11.2 24.843,13.657 24.843,20.957 ; IC19A.5@60.25,66 IC19A.4@60.25,67.27 61.83,67.27 62.3,66.8 62.3,63.7 61.8,63.2 59.5,63.2 54.6,58.3 54.6,47.6 55.9,46.3 55.9,26.4 50.2,20.7 30,20.7 29.743,20.957 24.843,20.957 ; 17.8,25.1 22.2,25.1 T13A.2@22.4,25.3 ; T13A.2@22.4,25.3 22.4,23.4 24.843,20.957
HV_OUT_RB: C85B.2 D4B.2 IC19B.4 IC19B.5 R118B.2 T13B.2 T16B.3 | length 92.1
  Layer 1 w0.5: R118B.2@14.4,62.3 17.5,62.3 18.2,63 18.2,65.5 19.7,67 ; C85B.2@18.4,74.975 18.4,68.3 19.7,67 ; D4B.2@22.4,70.25 22.4,69.25 T13B.2@22.4,67 ; T16B.3@27.3,52.9 24.843,55.357 24.843,62.657 ; IC19B.5@60.25,79.8 IC19B.4@60.25,81.07 61.83,81.07 62.3,80.6 62.3,77.5 61.8,77 53.4,77 47.8,71.4 47.8,67 43.457,62.657 24.843,62.657 ; 19.7,67 T13B.2@22.4,67 ; T13B.2@22.4,67 22.4,65.1 24.843,62.657
HV_OUTA: J3.1 R118A.1 R121A.2 | length 10.4
  Layer 1 w0.5: R118A.1@14.4,30.8 14.4,32.1 14.1,32.4 13.1,32.4 12.5,33 J3.1@12.5,35.1 13,35.1 15,37.1 R121A.2@16.4,37.1
HV_OUTB: J1.1 R118B.1 R121B.2 | length 14.1
  Layer 1 w0.5: R118B.1@14.4,68.5 13.275,68.5 12.5,69.275 12.5,76.2 15.1,78.8 R121B.2@16.4,78.8
N2kV0: C14.1 R7.2 R119A.2 R119B.2 | length 76.7
  Layer 1 w0.9: v3(45.2,15.3) R119A.2@45.2,16.7 ; v3(45.305,57) R119B.2@45.305,58.4 ; v4(63.75,22.6) C14.1@65.15,22.6
  Layer 4 w0.9: v3(45.305,57) 42.5,57 36.1,50.6 36.1,24.4 v3(45.2,15.3) 53.2,15.3 60.5,22.6 v4(63.75,22.6)
N14V0: C33.2 C60.2 C61.2 C69A.1 C69B.1 C70A.1 C70B.1 C76A.2 C76B.2 C77A.2 C77B.2 C81A.2 C81B.2 C84A.2 C84B.2 C87A.2 C87B.2 C88A.1 C88B.1 C89A.1 C89B.1 C90A.2 C90B.2 IC7.5 IC11.11 IC14A.4 IC14B.4 IC15A.18 IC15B.18 IC16A.4 IC16B.4 IC20A.4 IC20B.4 IC21A.3 IC21B.3 IC22A.2 IC22B.2 R30.2 R124A.1 R124B.1 | length 14.4
  Layer 1 w0.2: IC21A.3@69.75,60.87 69.75,61.75 70,62 R124A.1@71.03,62 ; IC21B.3@69.75,74.67 69.75,75.55 70,75.8 R124B.1@71.03,75.8
  Layer 1 w0.4: v1(71.03,61.41) R124A.1@71.03,62 ; v1(71.03,75.21) R124B.1@71.03,75.8 ; IC20A.4@83.005,60.1 83.9,60.1 84.05,59.95 C90A.2@84.6,59.95 v1(85.19,59.95) ; IC20B.4@83.005,73.9 83.9,73.9 84.05,73.75 C90B.2@84.6,73.75 v1(85.19,73.75) ; IC22A.2@88.6,65.5 90.05,65.5 C84A.2@90.1,65.55 v1(90.69,65.55) ; IC22B.2@88.6,79.3 90.05,79.3 C84B.2@90.1,79.35 v1(90.69,79.35)
  other v1: 128.1,54.6 128.8,54.6 129.5,54.6 126.9,57.3 127.6,57.3 128.3,57.3 112.3,61 113,61 113.7,61 95.1,67 95.1,67.7 95.1,68.4 128.1,78.1 128.8,78.1 129.5,78.1 126.9,80.8 127.6,80.8 128.3,80.8 112.3,84.5 113,84.5 113.7,84.5
  other v2: 116.5,13.3 117.5,13.3
  other v5: 117,12.8
N15V0: C32.2 L6.2 R28.2 R29.1 R31.2 | length 28.7
  Layer 1 w0.4: R31.2@120.5,20.03 120.52,20.03 120.62,19.931 120.62,19.911 121.455,19.075 L6.2@123.5,19.075 ; R28.2@143.6,22.3 v1(144.5,22.3)
  Layer 3 w0.4: v2(123.1,16.8) 127.1,16.8 128.5,18.2 140.5,18.2 142.3,20 142.3,21.3 143.3,22.3 v1(144.5,22.3)
NetC3_2: C3.2 IC2.3 R1.1 R127.2 | length 21.7
  Layer 1 w0.5: C3.2@65.15,47.5 65.15,51.45 66.1,52.4 74.6,52.4 75.8,51.2 R127.2@75.8,49.65 75.905,49.755 IC2.3@80.398,49.755
NetC4_2: C4.2 R1.2 R2.1
NetC12_1: C12.1 IC3.4 R6.1 R128.1 | length 29.4
  Layer 1 w0.5: C12.1@65.15,6.6 65.15,2.65 66.1,1.7 74.6,1.7 75.8,2.9 R128.1@75.8,4.45 78.25,4.45 79.2,5.4 79.2,11.982 79.493,12.275 79.593,12.275 80.398,13.08 IC3.4@80.398,13.395
NetC13_1: C13.1 R6.2 R7.1
NetC17_2: C17.2 IC4.1 IC4.3 R9.2 | length 6.1
  Layer 1 w0.15: v2(135.384,36.058) IC4.1@136.121,36.058 ; v2(135.384,37.958) IC4.3@136.121,37.958
  Layer 1 w0.5: IC4.1@136.121,36.058 137.492,36.058 C17.2@137.5,36.05 138.48,36.05 R9.2@138.5,36.03
  Layer 6 w0.15: v2(135.384,36.058) 135.8,36.474 135.8,37.542 v2(135.384,37.958)
NetC19_2: C19.2 IC5.8 R14.2 | length 5.6
  Layer 1 w0.2: IC5.8@141.025,12.5 141.025,11.575 141.7,10.9 143.53,10.9 143.85,11.22 143.85,11.24 144.04,11.43 R14.2@144.06,11.43 144.47,11.43 144.6,11.3 C19.2@145.11,11.3
NetC20_2: C20.2 R14.1 | length 1.1
  Layer 1 w0.2: R14.1@144.06,12.37 144.47,12.37 144.6,12.5 C20.2@145.11,12.5
NetC21_2: C21.2 D1.1 L5.1 R12.1 | length 3.6
  Layer 1 w0.4: R12.1@126.87,5.6 126.87,7.067 127.093,7.291 127.286,7.291 127.585,7.59 L5.1@127.585,8.8
NetC23_2: C23.2 IC6.1 IC6.3 R15.2 | length 4.9
  Layer 1 w0.15: IC6.3@120.9,10.75 123.15,10.75 123.3,10.6 123.3,9.1 123.15,8.95 C23.2@122.4,8.95
NetC24_2: C24.2 IC5.12 R19.2 | length 6.2
  Layer 1 w0.2: IC5.12@141.675,18.3 141.675,19.175 141.9,19.4 143.5,19.4 143.675,19.225 144.825,19.225 ; C24.2@144.825,18.4 144.825,19.225 ; R19.2@145.975,19.37 144.97,19.37 144.825,19.225
NetC26_2: C26.2 R19.1 | length 1.5
  Layer 1 w0.2: C26.2@145.775,17 145.775,17.675 145.975,17.875 R19.1@145.975,18.43
NetC27_1: C27.1 IC5.14 R27.2 | length 5
  Layer 1 w0.2: IC5.14@140.375,18.3 140.375,20.425 C27.1@140.4,20.45 140.95,20.45 141.1,20.6 141.1,21.4 141.6,21.9 141.6,21.95 141.95,22.3 R27.2@142,22.3
NetC28_2: C28.2 IC5.16 R24.2 R25.2 R26.2 | length 19.8
  Layer 1 w0.3: IC5.16@139.075,18.3 139.075,20.425 C28.2@139.1,20.45 ; R24.2@139.5,8.23 R26.2@141.5,8.23
  Layer 1 w0.4: v1(138.51,20.45) C28.2@139.1,20.45 ; v1(140.5,7.64) R25.2@140.5,8.23
  Layer 6 w0.4: v1(138.51,20.45) 139.85,20.45 140.5,19.8 v1(140.5,7.64)
NetC30_2: C30.2 IC7.2 IC7.3 R29.2 | length 2.4
  Layer 1 w0.15: IC7.2@120.9,15.2 120.2,15.2 120.1,15.3 120.1,16.062 120.188,16.15 IC7.3@120.9,16.15
NetC31_2: C31.2 D2.2 L6.1 R31.1 | length 3.4
  Layer 1 w0.4: R31.1@120.5,20.97 120.52,20.97 120.62,21.07 120.62,21.09 121.455,21.925 L6.1@123.5,21.925
NetC38_1: C38.1 C40.1 IC17.4 R62.2 | length 3.9
  Layer 1 w0.2: IC17.4@114.15,43.1 114.15,43.35 114.45,43.65 C40.1@114.45,44.4 R62.2@115.43,44.4 115.62,44.59 115.62,44.72 115.9,45 C38.1@115.9,45.7
NetC38_2: C38.2 R51.1 | length 2
  Layer 1 w0.2: R51.1@113.9,47.55 115.85,47.55 C38.2@115.9,47.5
NetC40_2: C40.2 D3.1 D3.2 IC17.1 R51.2 R63.1 | length 13.8
  Layer 1 w0.2: R63.1@110.7,40.53 IC17.1@112.22,40.53 ; IC17.1@112.25,40.5 112.25,40.75 112.55,41.05 112.55,41.45 113.2,42.1 ; R51.2@113.9,45.65 113.55,45.3 C40.2@113.55,44.4 113.2,44.05 113.2,42.1 ; D3.2@117.75,39.5 D3.1@115.85,39.5 115.85,40.85 114.6,42.1 113.2,42.1
NetC41_2: C41.2 R64.1 | length 1
  Layer 1 w0.4: C41.2@113.45,67.8 R64.1@114.43,67.8
NetC44_2: C44.2 IC17.3 P1.1 P1.2 R83.2 | length 12.4
  Layer 1 w0.2: P1.1@109.25,38.07 110.93,38.07 112.2,36.8 P1.2@114.35,36.8 ; IC17.3@114.15,40.5 114.15,39.15 114.35,38.95 P1.2@114.35,36.8 ; C44.2@116.15,38.2 116.13,38.18 R83.2@116.13,37.2 116.13,37.18 115.94,36.99 115.92,36.99 115.73,36.8 P1.2@114.35,36.8
NetC58_2: C58.2 IC12.6 R104.1
NetC83A_1: C83A.1 D5A.1 D6A.2 IC20A.1 | length 7.7
  Layer 1 w0.2: D5A.1@75.6,63.6 D6A.2@75.6,62 75.6,60.2 76.35,59.45 C83A.1@77.8,59.45 78.25,59.45 78.5,59.7 78.5,59.9 78.7,60.1 IC20A.1@79.195,60.1
NetC83A_2: C83A.2 R114A.1 | length 1
  Layer 1 w0.2: C83A.2@77.8,60.35 R114A.1@77.8,61.33
NetC83B_1: C83B.1 D5B.1 D6B.2 IC20B.1 | length 7.7
  Layer 1 w0.2: D5B.1@75.6,77.4 D6B.2@75.6,75.8 75.6,74 76.35,73.25 C83B.1@77.8,73.25 78.25,73.25 78.5,73.5 78.5,73.7 78.7,73.9 IC20B.1@79.195,73.9
NetC83B_2: C83B.2 R114B.1 | length 1
  Layer 1 w0.2: C83B.2@77.8,74.15 R114B.1@77.8,75.13
NetC85A_1: C85A.1 R121A.1 RN3A.1 RN3A.2 RN3A.3 | length 11.6
  Layer 1 w0.5: C85A.1@18.4,34.9 R121A.1@18.4,37.1 18.4,38.6 17.42,39.58 RN3A.1@17.42,41 RN3A.3@22.5,41
NetC85B_1: C85B.1 R121B.1 RN3B.1 RN3B.2 RN3B.3 | length 11.6
  Layer 1 w0.5: C85B.1@18.4,76.575 18.4,78.775 18.4,80.275 17.42,81.255 RN3B.1@17.42,82.675 RN3B.3@22.5,82.675
NetC91_1: C91.1 C93.1 IC9.2 R140.2 | length 6.9
  Layer 1 w0.2: C91.1@119.6,39.2 119.6,38.35 C93.1@120.15,37.8 120.15,37.25 120.225,37.175 IC9.2@120.225,36.2 120.225,34.875 120.8,34.3 R140.2@122.33,34.3
NetC91_2: C91.2 R135.1 | length 2
  Layer 1 w0.2: C91.2@119.6,41 121.55,41 R135.1@121.6,41.05
NetC92_1: C92.1 C94.1 IC9.6 R142.2 | length 7.7
  Layer 1 w0.2: R142.2@118.47,30.2 119.5,30.2 119.5,30.8 119.575,30.875 IC9.6@119.575,31.8 ; C94.1@119.45,30.2 119.45,28.75 120.5,27.7 C92.1@122.6,27.7
NetC92_2: C92.2 R136.1 | length 2
  Layer 1 w0.2: C92.2@124.4,27.7 124.45,27.75 R136.1@124.45,29.7
NetC93_2: C93.2 D8.1 D8.2 IC9.1 R135.2 R143.1 | length 8.4
  Layer 1 w0.2: IC9.1@120.875,36.2 120.875,37.075 121.05,37.25 C93.2@121.05,37.8 121.6,38.35 R135.2@121.6,39.15 123.08,39.15 123.08,38.48 122.7,38.1 D8.1@122.7,37.55 D8.2@122.7,35.65
NetC94_2: C94.2 D9.1 D9.2 IC9.7 R136.2 R144.1 | length 12.7
  Layer 1 w0.2: IC9.7@120.225,31.8 120.225,30.875 120.35,30.75 C94.2@120.35,30.2 121,29.55 D9.2@121,28.85 121.925,28.85 122.55,29.475 R136.2@122.55,29.7 123.3,29.7 123.43,29.57 R144.1@123.43,26.2 121.2,26.2 121,26.4 D9.1@121,26.95
NetC103_2: C103.2 IC9.3 P2.3 R145.1 | length 15.8
  Layer 1 w0.2: P2.3@109.25,30.13 112.67,30.13 112.8,30 115.4,30 115.57,30.17 R145.1@116.1,30.17 C103.2@116.1,31.15 117.25,31.15 117.4,31.3 117.4,33.5 118.1,34.2 119.2,34.2 119.575,34.575 IC9.3@119.575,36.2
NetC104_2: C104.2 IC9.5 P3.3 R146.1 | length 18.3
  Layer 1 w0.2: P3.3@109.25,24.73 112.87,24.73 113.3,24.3 115.2,24.3 115.57,24.67 R146.1@116.1,24.67 ; C104.2@116.1,25.65 R146.1@116.1,24.67 ; v1(117.7,24.3) 116.47,24.3 116.31,24.46 116.31,24.48 116.12,24.67 R146.1@116.1,24.67 ; v1(118.3,31.8) IC9.5@118.925,31.8
  Layer 4 w0.2: v1(117.7,24.3) 117.7,30.4 118.3,31 v1(118.3,31.8)
NetD1_2: D1.2 IC5.2 L4.2
NetD2_1: D2.1 IC5.20 L7.2
NetD3_3: D3.3 R61.2 R62.1 | length 2.5
  Layer 1 w0.2: R62.1@116.37,44.4 R61.2@116.37,43.4 116.37,42.667 116.487,42.55 116.6,42.55 116.8,42.35 D3.3@116.8,42.1
NetD4A_1: D4A.1 R113A.2 T13A.1 | length 13.3
  Layer 1 w0.5: D4A.1@22.4,32.85 T13A.1@22.4,36.3 25,36.3 26.1,37.4 26.1,40.2 27.2,41.3 R113A.2@28.5,41.3
NetD4B_1: D4B.1 R113B.2 T13B.1 | length 14.3
  Layer 1 w0.5: D4B.1@22.4,74.55 T13B.1@22.4,78 25,78 26.1,79.1 26.1,82.9 27.2,84 R113B.2@28.5,84
NetD5A_2: D5A.2 R115A.1 T14A.1 | length 8.8
  Layer 1 w0.2: R115A.1@71.97,63.6 71.97,64.67 72.35,65.05 ; T14A.1@73.65,65.05 72.35,65.05 ; D5A.2@75.6,67.2 74.8,67.2 74.3,67.7 72.8,67.7 72.35,67.25 72.35,65.05
NetD5B_2: D5B.2 R115B.1 T14B.1 | length 8.8
  Layer 1 w0.2: R115B.1@71.97,77.4 71.97,78.47 72.35,78.85 ; T14B.1@73.65,78.85 72.35,78.85 ; D5B.2@75.6,81 74.8,81 74.3,81.5 72.8,81.5 72.35,81.05 72.35,78.85
NetD6A_1: D6A.1 R124A.2 T15A.1 | length 6.6
  Layer 1 w0.2: R124A.2@71.97,62 71.97,60.73 72.4,60.3 72.4,59 72.75,58.65 T15A.1@73.65,58.65 74.55,58.65 74.8,58.4 D6A.1@75.6,58.4
NetD6B_1: D6B.1 R124B.2 T15B.1 | length 6.6
  Layer 1 w0.2: R124B.2@71.97,75.8 71.97,74.53 72.4,74.1 72.4,72.8 72.75,72.45 T15B.1@73.65,72.45 74.55,72.45 74.8,72.2 D6B.1@75.6,72.2
NetD7A_1: D7A.1 R122A.1 T16A.1 | length 6.3
  Layer 1 w0.5: D7A.1@40.3,9.15 T16A.1@40.3,5.7 R122A.1@43.2,5.7
NetD7A_2: D7A.2 IC21A.4 IC21A.5 R119A.1 T16A.2 | length 62.2
  Layer 1 w0.5: D7A.2@40.3,13.45 T16A.2@40.3,16.7 ; R119A.1@43.2,16.7 43.2,17.9 44.2,18.9 50.8,18.9 58,26.1 58,58.9 58.7,59.6 IC21A.5@60.25,59.6 IC21A.4@60.25,60.87
  Layer 1 w0.95: T16A.2@40.3,16.7 R119A.1@43.2,16.7
NetD7B_1: D7B.1 R122B.1 T16B.1 | length 6.3
  Layer 1 w0.5: D7B.1@40.3,50.85 T16B.1@40.3,47.4 R122B.1@43.2,47.4
NetD7B_2: D7B.2 IC21B.4 IC21B.5 R119B.1 T16B.2 | length 34.4
  Layer 1 w0.5: D7B.2@40.3,55.15 T16B.2@40.3,58.4 T16B.2@40.405,58.4 ; R119B.1@43.305,58.4 43.305,59.705 49.7,66.1 49.7,70.3 54.07,74.67 IC21B.4@60.25,74.67 IC21B.5@60.25,73.4
  Layer 1 w0.95: T16B.2@40.405,58.4 R119B.1@43.305,58.4
NetD8_3: D8.3 R139.2 R140.1 | length 4.2
  Layer 1 w0.2: R140.1@123.27,34.3 R139.2@124.23,34.3 124.23,36.33 124.5,36.6 D8.3@125.3,36.6
NetD9_3: D9.3 R141.2 R142.1 | length 3.6
  Layer 1 w0.2: R142.1@117.53,30.2 117.53,30.18 117.34,29.99 117.32,29.99 117.1,29.77 R141.2@117.1,29.27 118.03,29.27 118.4,28.9 D9.3@118.4,27.9
NetIC2_5: IC2.5 IC3.5 R4.2 T1.3 | length 35.7
  Layer 1 w0.15: v1(95.2,15.7) 95.203,15.697 IC3.5@95.203,13.395 ; v1(95.2,41.7) 95.2,39.598 IC2.5@95.203,39.595 ; IC2.5@95.208,39.6 T1.3@97.85,39.6 97.85,40.85 97.9,40.9 R4.2@97.9,42.23
  Layer 6 w0.15: v1(95.2,15.7) v1(95.2,41.7)
NetIC4_4: IC4.4 R10.1 R11.2 | length 4.9
  Layer 1 w0.2: R10.1@131,36.97 131,37.4 131.13,37.53 R11.2@131.13,38 131.13,38.63 131.3,38.8 133.3,38.8 133.521,38.579 IC4.4@133.521,37.958
NetIC5_3: IC5.3 L4.1
NetIC5_4: IC5.4 R24.1 | length 3.8
  Layer 1 w0.15: IC5.4@138.425,12.5 138.425,11.075 139.5,10 R24.1@139.5,9.17
NetIC5_5: IC5.5 R25.1 | length 3.9
  Layer 1 w0.15: IC5.5@139.075,12.5 139.075,11.325 140.5,9.9 R25.1@140.5,9.17
NetIC5_6: IC5.6 R26.1 | length 4.1
  Layer 1 w0.15: IC5.6@139.725,12.5 139.725,11.575 141.5,9.8 R26.1@141.5,9.17
NetIC5_7: IC5.7 R20.1 R22.2 | length 6.7
  Layer 1 w0.2: IC5.7@140.375,12.5 140.375,11.525 141.8,10.1 142.9,10.1 143.1,9.9 R22.2@143.1,9.2 R20.1@144.7,9.2
NetIC5_9: IC5.9 IC5.11 R13.1 | length 7.9
  Layer 1 w0.2: IC5.9@141.675,12.5 141.675,13.475 142,13.8 142.6,13.8 143.1,14.3 143.1,15.2 143.4,15.5 ; IC5.11@142.325,18.3 142.325,16.575 143.4,15.5 ; R13.1@144.03,15.5 143.4,15.5
NetIC5_10: IC5.10 R21.1 | length 3.1
  Layer 1 w0.2: IC5.10@142.325,12.5 143.1,12.5 143.3,12.7 143.3,13.8 143.5,14 R21.1@144.2,14
NetIC5_13: IC5.13 R27.1 R28.1 | length 4.6
  Layer 1 w0.2: IC5.13@141.025,18.3 141.025,19.325 141.5,19.8 141.8,19.8 142,20 R27.1@142,20.7 R28.1@143.6,20.7
NetIC6_4: IC6.4 R16.1 R18.2 | length 4.8
  Layer 1 w0.3: R16.1@116.6,9 116.55,9 116.25,9.3 116.25,9.35 116,9.6 116,11 116.2,11.2 116.87,11.2 R18.2@116.9,11.17 117.655,11.17 118.075,10.75 IC6.4@118.3,10.75
NetIC7_4: IC7.4 R30.1 R32.2 | length 3.2
  Layer 1 w0.4: R30.1@116.6,16.1 117.5,16.1 117.55,16.15 IC7.4@118.3,16.15 118.23,16.22 R32.2@118.23,17.6
NetIC11_2: IC11.2 RN1.1 RN1.2 | length 9.3
  Layer 1 w0.3: RN1.1@104.2,59.625 RN1.2@104.2,60.275 105.275,60.275 105.5,60.5 105.5,62.2 105.3,62.4 103.9,62.4 103.2,63.1 103.2,64.3 103.56,64.66 IC11.2@104.7,64.66
NetIC11_3: IC11.3 R101.2 R103.2 | length 2.7
  Layer 1 w0.2: IC11.3@104.7,65.93 105.73,65.93 105.8,66 R101.2@106.33,66 R103.2@106.33,65
NetIC11_5: IC11.5 RN2.5 RN2.6 | length 6.9
  Layer 1 w0.3: RN2.6@104.2,73.475 RN2.5@104.2,72.825 103.725,72.825 103.3,72.4 103.3,68.7 103.53,68.47 IC11.5@104.7,68.47
NetIC11_12: IC11.12 R106.2 R107.2 | length 2.5
  Layer 1 w0.3: R107.2@97.77,64.9 R106.2@97.77,65.9 99.27,65.9 IC11.12@99.3,65.93
NetIC11_13: IC11.13 RN1.3 RN1.4 | length 6.8
  Layer 1 w0.3: IC11.13@99.3,64.66 100.64,64.66 103.65,61.65 104.125,61.65 RN1.4@104.2,61.575 RN1.3@104.2,60.925
NetIC12_1: IC12.1 R105.2 | length 2
  Layer 1 w0.15: IC12.1@98.3,80.225 98.3,79.8 98.47,79.63 R105.2@99.8,79.63
NetIC13_4: IC13.4 R100.1 R102.2 | length 3.5
  Layer 1 w0.3: R102.2@99.8,84.47 99.83,84.5 R100.1@101.4,84.5 101.45,84.45 IC13.4@103.3,84.45
NetIC19A_3: IC19A.3 T14A.3 | length 2.6
  Layer 1 w0.2: IC19A.3@69.75,67.27 70.93,67.27 71.35,66.85 T14A.3@71.35,66
NetIC19A_6: IC19A.6 R113A.1 | length 44.7
  Layer 1 w0.5: R113A.1@30.5,41.3 40.4,41.3 43.3,44.2 47.2,44.2 52.7,49.7 52.7,58.6 58.83,64.73 IC19A.6@60.25,64.73
NetIC19B_3: IC19B.3 T14B.3 | length 2.6
  Layer 1 w0.2: IC19B.3@69.75,81.07 70.93,81.07 71.35,80.65 T14B.3@71.35,79.8

## Text inside footprints (layer, text, board x,y; h text height)
IC2: Top Overlay "5" at 94.7,42.6 h1 r270; Top Overlay "4" at 79.9,42.7 h1 r270; Top Overlay "3" at 79.9,47.4 h1 r270; Top Overlay "2" at 94.7,44.2 h1 r270; Drill Drawing "R 6" at 85.6,34.8 h1 r270; Drill Drawing "24" at 88.1,47.6 h1 r270; Drill Drawing "12" at 84.3,41.8 h1; Drill Drawing "R 1.1" at 83.9,51.5 h1 r270; Mechanical 14 "5" at 94.7,42.6 h1 r270; Mechanical 14 "4" at 79.9,42.7 h1 r270; Mechanical 14 "3" at 79.9,47.4 h1 r270; Mechanical 14 "2" at 94.7,44.2 h1 r270
IC3: Top Overlay "5" at 94.7,16.4 h1 r270; Top Overlay "4" at 79.9,16.5 h1 r270; Top Overlay "3" at 79.9,21.2 h1 r270; Top Overlay "2" at 94.7,18 h1 r270; Drill Drawing "R 6" at 85.6,8.6 h1 r270; Drill Drawing "24" at 88.1,21.4 h1 r270; Drill Drawing "12" at 84.3,15.6 h1; Drill Drawing "R 1.1" at 83.9,25.3 h1 r270; Mechanical 14 "5" at 94.7,16.4 h1 r270; Mechanical 14 "4" at 79.9,16.5 h1 r270; Mechanical 14 "3" at 79.9,21.2 h1 r270; Mechanical 14 "2" at 94.7,18 h1 r270
J5: Top Overlay "1" at 146.364,43.804 h1 r90; Top Overlay "2" at 139,44.8 h1 r90; Top Overlay "15" at 146.8,60.1 h1 r90; Top Overlay "16" at 138.9,58.5 h1 r90